# EAGLE board BattleBits (EAGLE 9.3.2)
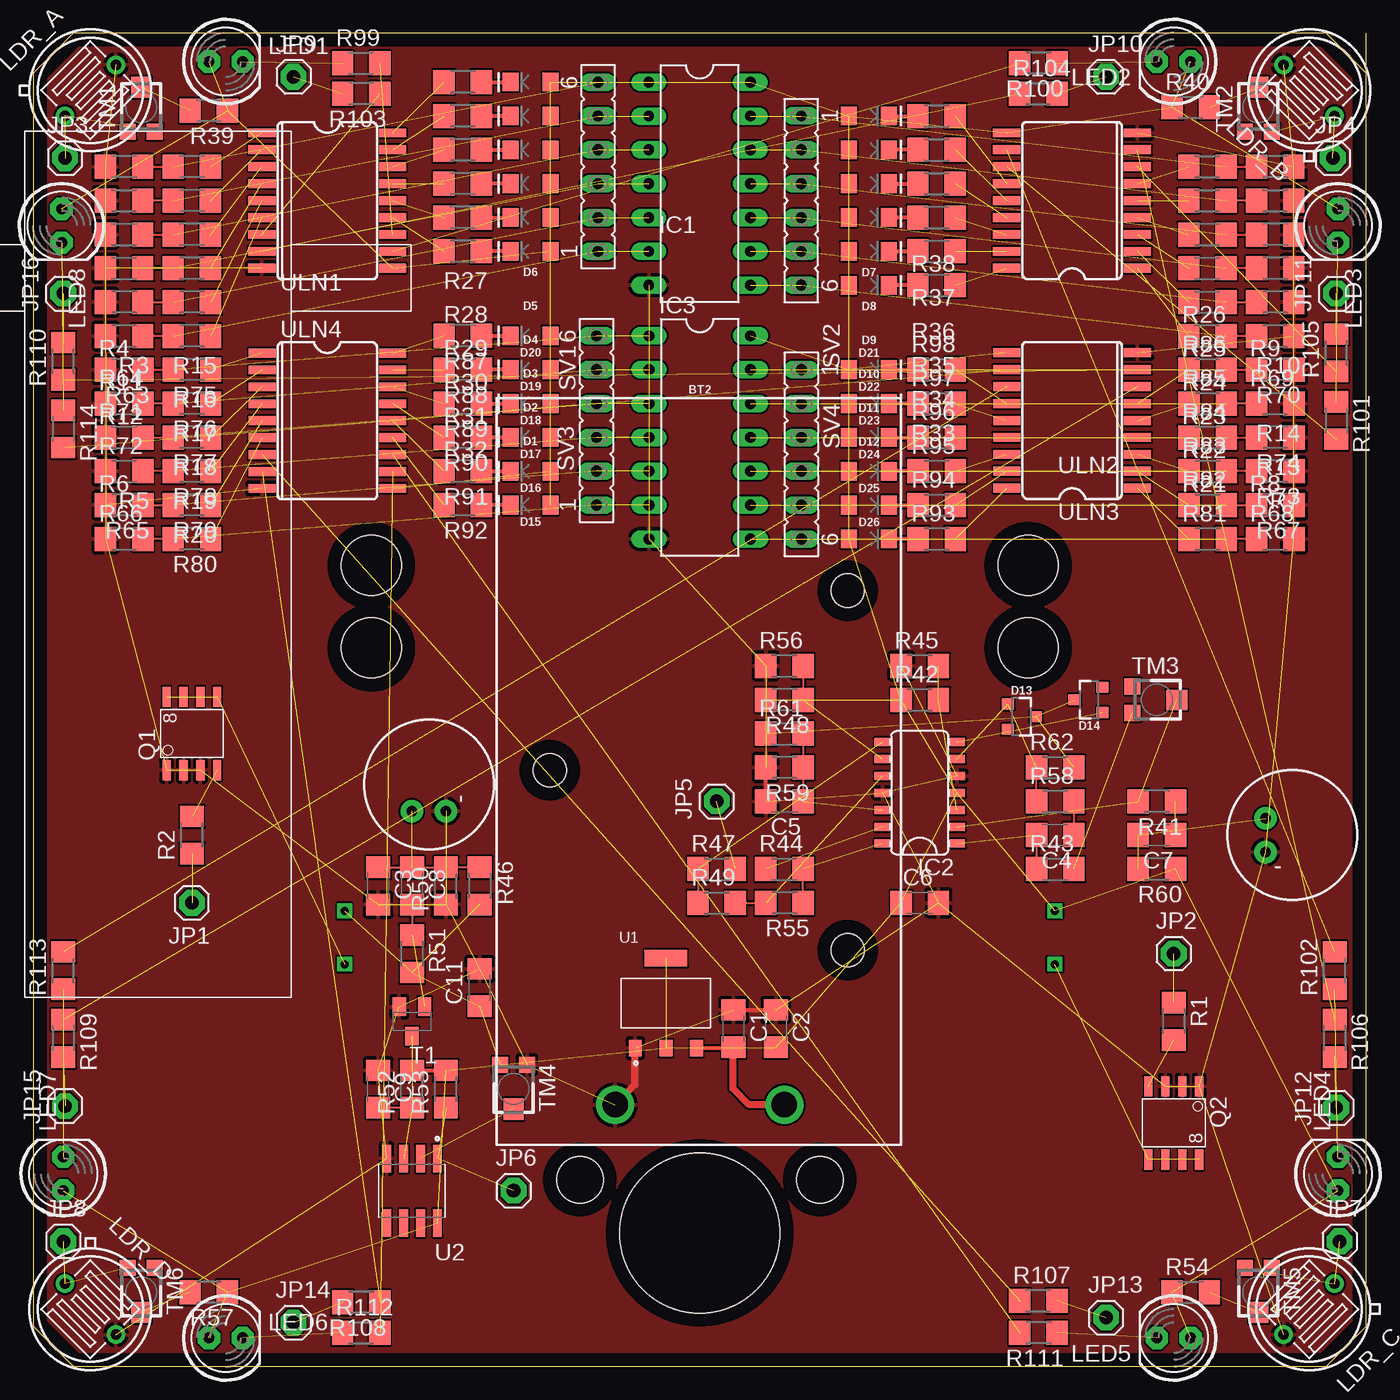
[diagram p0: board, top side]
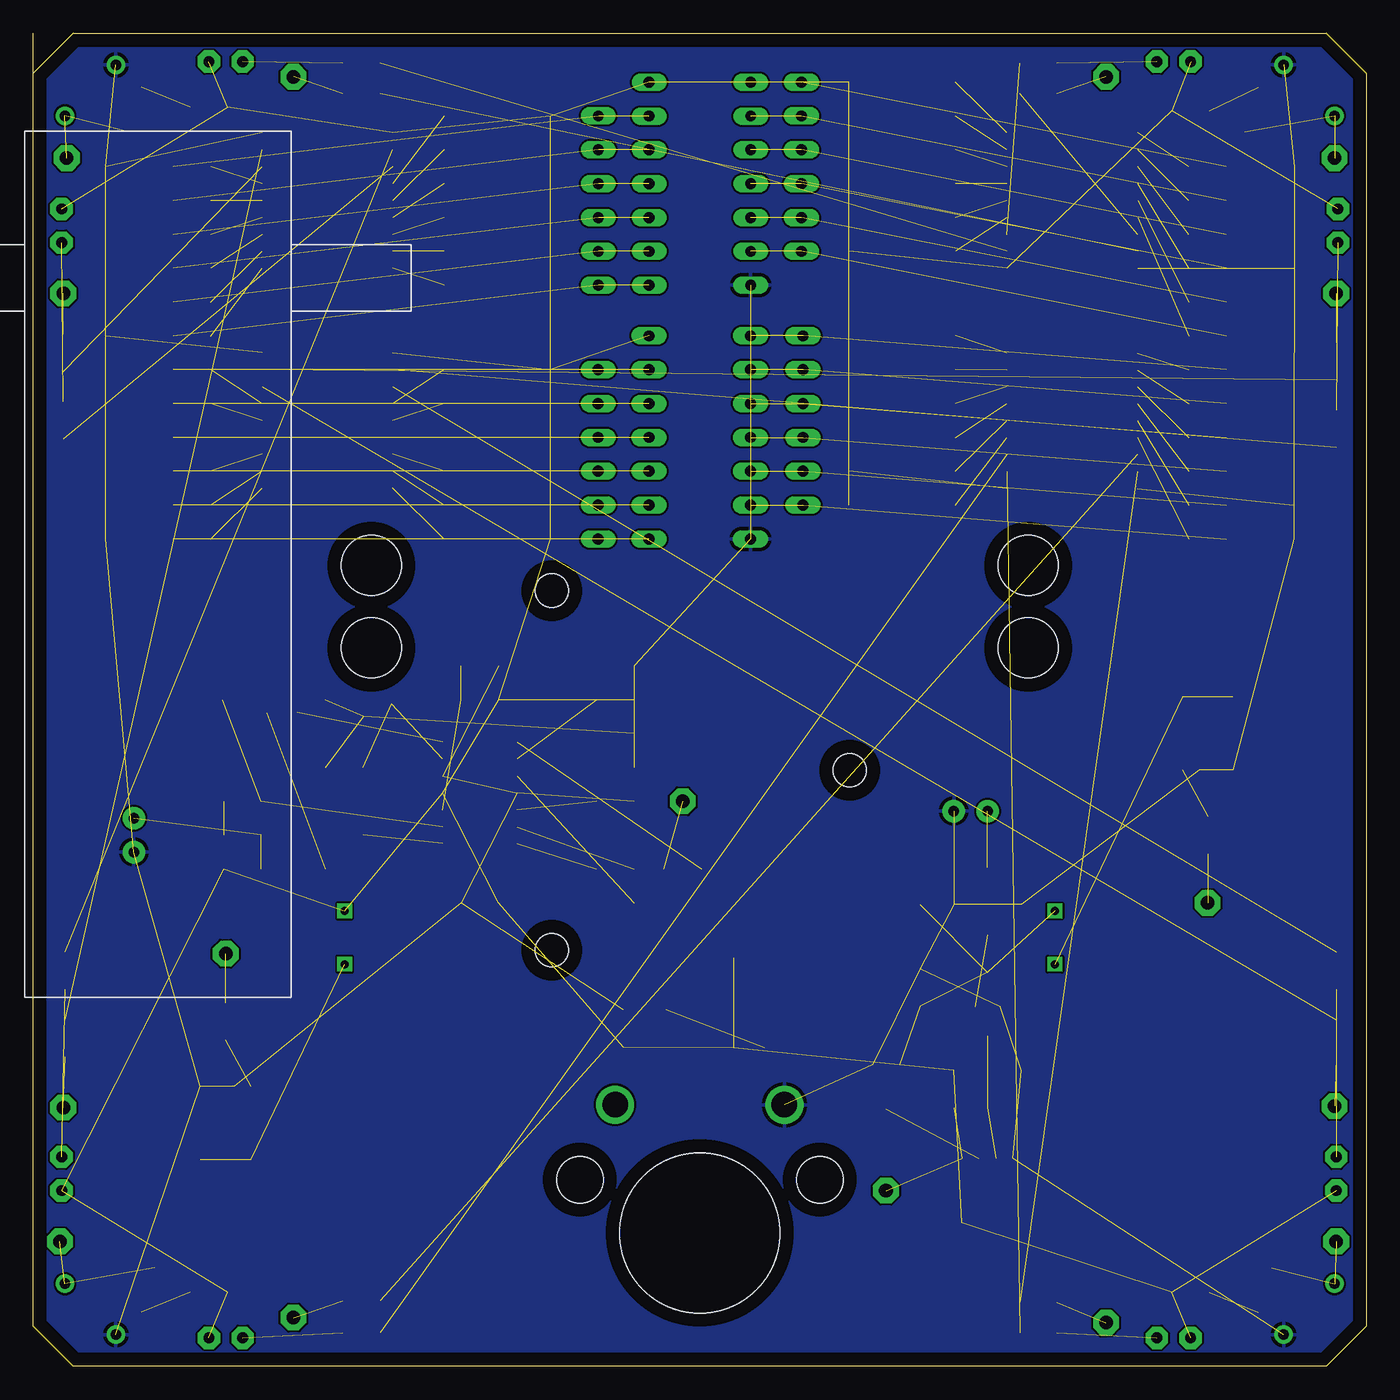
[diagram p1: board, bottom side, seen from below]

Size 100 x 100 mm. Coordinates in mm from the lower left corner, seen from the top.
Outline: 100,97 100,3 97,0 3,0 0,3 0,97 3,100 97,100 100,97
Outline: 100,97 100,100
Copper layers (1*16): Top 0.035mm / dielectric 1.5mm / Bottom 0.035mm
Design rules "default *": minimum track width 6mil, minimum drill 0.35mm, track to track 6mil, track to pad 6mil, pad to pad 6mil, via to via 6mil, smd to smd 6mil, copper to edge 40mil, drill to drill 6mil, minimum pad ring 10mil, minimum via ring 8mil, stop-mask expansion 4mil, vias tented up to drill 0mil, thermal gap 10mil
Net classes: 0 PWR: width 0.305 mm, drill 0.3 mm, clearance 0.152 mm; 1 SIGNAL: width 0.152 mm, drill 0.3 mm, clearance 0.152 mm
Holes 12 mm at 50,10
Holes 3.5 mm at 59,14 41,14

## Footprints (pad centres in the part's own frame; a part is rotated, then mirrored left to right if it is on the bottom)
BATTCON_9V = drill 1.905: + 0,0; - 0,-12.7 | hole 2.5: -38.57,4.74; -25.09,-17.61; -11.6,4.74
C3216 = smd 1.6 x 1.8: 1 -1.4,0; 2 1.4,0
LED-1206 = smd 1.2 x 1.4: A -1.5,0; C 1.5,0
SOT23-3 = smd 0.8 x 0.9: 1 -0.95,-1; 2 0.95,-1; 3 0,1.1
DIL14 = drill 0.813 long: 1 -7.62,-3.81; 2 -5.08,-3.81; 3 -2.54,-3.81; 4 0,-3.81; 5 2.54,-3.81; 6 5.08,-3.81; 7 7.62,-3.81; 8 7.62,3.81; 9 5.08,3.81; 10 2.54,3.81; 11 0,3.81; 12 -2.54,3.81; 13 -5.08,3.81; 14 -7.62,3.81
SO014 = smd 0.6 x 1.2: 1 -3.175,-2.8; 2 -1.905,-2.8; 3 -0.635,-2.8; 4 0.635,-2.8; 5 1.905,-2.8; 6 3.175,-2.8; 7 4.445,-2.8; 8 4.445,2.8; 9 3.175,2.8; 10 1.905,2.8; 11 0.635,2.8; 12 -0.635,2.8; 13 -1.905,2.8; 14 -3.175,2.8
1X01 = drill 1.016 pad 1.93 octagon: 1 0,0
TO-5_V10 = drill 0.8 pad 1.4: 1 -2.7,0; 2 2.7,0
LED5MM = drill 0.813 pad 1.676 octagon: A -1.27,0; K 1.27,0
MIC-9.7MM = drill 0.8 pad 1.676: 1 -2,1.27; 2 -2,-1.27
SO-8 = smd 1.524 x 0.61: 1 -2.743,1.905; 2 -2.743,0.635; 3 -2.743,-0.635; 4 -2.743,-1.905; 5 2.743,-1.905; 6 2.743,-0.635; 7 2.743,0.635; 8 2.743,1.905
R3216 = smd 1.6 x 1.8: 1 -1.4,0; 2 1.4,0
FE06 = drill 0.813 long: 1 -6.35,0; 2 -3.81,0; 3 -1.27,0; 4 1.27,0; 5 3.81,0; 6 6.35,0
SOT23-BEC = smd 1 x 1.4: B -0.95,-1.1; C 0,1.1; E 0.95,-1.1
TC33X = smd 1.2 x 1.2: 1 -1,-1.825; 3 1,-1.825 | smd 1.5 x 1.6: 2 0,1.5
SOT-223 = smd 0.96 x 1.26: 1 -2.3,-3.375; 2 0,-3.375; 3 2.3,-3.375 | smd 3.19 x 1.26: 4 0,3.375
8-SOIC = smd 0.66 x 2.07: 1 -1.905,-2.42; 2 -0.635,-2.42; 3 0.635,-2.42; 4 1.905,-2.42; 5 1.905,2.42; 6 0.635,2.42; 7 -0.635,2.42; 8 -1.905,2.42
GEARMOTOR = drill 0.6 square: P$1 14,-30; P$2 14,-26 | hole 4.5: 16,-6.27; 16,-0.08
SO18L = smd 0.66 x 2.032: 1 -0.635,-4.902; 2 0.635,-4.902; 3 1.905,-4.902; 4 3.175,-4.902; 5 4.445,-4.902; 6 5.715,-4.902; 7 6.985,-4.902; 8 8.255,-4.902; 9 9.525,-4.902; 10 9.525,4.902; 11 8.255,4.902; 12 6.985,4.902; 13 5.715,4.902; 14 4.445,4.902; 15 3.175,4.902; 16 1.905,4.902; 17 0.635,4.902; 18 -0.635,4.902

## Placement (x,y rotation side)
BT2  [BATTCON_9V]  56.35,19.62 270 top
C1  10uF  [C3216]  52.54,25.33 270 top
C2  10uF  [C3216]  55.72,25.33 270 top
C3  0.1uF  [C3216]  25.87,36.03 270 top
C4  1.0uF  [C3216]  76.67,39.84 180 top
C5  10uF  [C3216]  56.35,42.38 180 top
C6  0.1uF  [C3216]  66.51,34.76 0 top
C7  10uF  [C3216]  84.29,39.84 180 top
C8  0.1uF  [C3216]  28.41,36.03 270 top
C9  0.1uF  [C3216]  25.87,20.79 270 top
C11  1.0uF  [C3216]  33.49,28.41 90 top
D1  [LED-1206]  37.29,83.64 180 top
D2  [LED-1206]  37.29,86.18 180 top
D3  [LED-1206]  37.29,88.72 180 top
D4  [LED-1206]  37.29,91.26 180 top
D5  [LED-1206]  37.29,93.8 180 top
D6  [LED-1206]  37.29,96.34 180 top
D7  [LED-1206]  62.69,93.8 0 top
D8  [LED-1206]  62.69,91.26 0 top
D9  [LED-1206]  62.69,88.72 0 top
D10  [LED-1206]  62.69,86.18 0 top
D11  [LED-1206]  62.69,83.64 0 top
D12  [LED-1206]  62.69,81.1 0 top
D13  40V, 120 mA  [SOT23-3]  74.13,48.73 270 top
D14  40V, 120 mA  [SOT23-3]  79.21,50 90 top
D15  [LED-1206]  37.3,64.61 180 top
D16  [LED-1206]  37.3,67.14 180 top
D17  [LED-1206]  37.3,69.69 180 top
D18  [LED-1206]  37.3,72.22 180 top
D19  [LED-1206]  37.3,74.77 180 top
D20  [LED-1206]  37.3,77.31 180 top
D21  [LED-1206]  62.7,74.77 0 top
D22  [LED-1206]  62.7,72.22 0 top
D23  [LED-1206]  62.7,69.69 0 top
D24  [LED-1206]  62.7,67.14 0 top
D25  [LED-1206]  62.7,64.61 0 top
D26  [LED-1206]  62.7,62.06 0 top
IC1  4001N  [DIL14]  49.99,88.72 270 top
IC2  LMV324  [SO014]  66.51,42.38 90 top
IC3  4001N  [DIL14]  50,69.69 270 top
JP1  [1X01]  11.9,34.76 180 top
JP2  [1X01]  85.56,30.95 0 top
JP3  [1X01]  2.38,90.64 0 top
JP4  [1X01]  97.5,90.64 0 top
JP5  [1X01]  51.27,42.38 90 top
JP6  [1X01]  36.03,13.17 0 top
JP7  [1X01]  98.01,9.36 0 top
JP8  [1X01]  2.25,9.36 0 top
JP9  [1X01]  19.52,96.74 0 top
JP10  [1X01]  80.48,96.74 0 top
JP11  [1X01]  97.75,80.48 90 top
JP12  [1X01]  97.75,19.39 90 top
JP13  [1X01]  80.48,3.65 0 top
JP14  [1X01]  19.52,3.26 0 top
JP15  [1X01]  2.38,19.52 90 top
JP16  [1X01]  2.25,80.48 90 top
LDR_A  V1060_21  [TO-5_V10]  4.28,95.72 225 top
LDR_B  V1060_21  [TO-5_V10]  95.72,95.72 315 top
LDR_C  V1060_21  [TO-5_V10]  95.72,4.28 45 top
LDR_D  V1060_21  [TO-5_V10]  4.28,4.28 135 top
LED1  [LED5MM]  14.44,97.88 0 top
LED2  [LED5MM]  85.56,97.88 180 top
LED3  [LED5MM]  97.88,85.56 270 top
LED4  [LED5MM]  97.88,14.44 90 top
LED5  [LED5MM]  85.56,2.12 180 top
LED6  [LED5MM]  14.44,2.12 0 top
LED7  [LED5MM]  2.25,14.44 90 top
LED8  [LED5MM]  2.12,85.56 270 top
MIC1  MIC9.7MM  [MIC-9.7MM]  94.45,39.84 0 top
MIC2  MIC9.7MM  [MIC-9.7MM]  29.68,43.65 90 top
Q1  FDS5680  [SO-8]  11.9,47.46 90 top
Q2  FDS5680  [SO-8]  85.56,18.25 270 top
R1  10K, 1%  [R3216]  85.56,25.87 270 top
R2  10K, 1%  [R3216]  11.9,39.84 90 top
R3  10K, 1%  [R3216]  6.81,89.99 180 top
R4  10K, 1%  [R3216]  6.81,87.45 0 top
R5  10K, 1%  [R3216]  6.81,79.83 180 top
R6  10K, 1%  [R3216]  6.81,77.29 0 top
R7  10K, 1%  [R3216]  93.17,79.83 180 top
R8  10K, 1%  [R3216]  93.17,77.29 0 top
R9  10K, 1%  [R3216]  93.17,87.45 0 top
R10  10K, 1%  [R3216]  93.17,89.99 180 top
R11  10K, 1%  [R3216]  6.81,84.91 0 top
R12  10K, 1%  [R3216]  6.81,82.37 0 top
R13  10K, 1%  [R3216]  93.17,82.37 180 top
R14  10K, 1%  [R3216]  93.17,84.91 180 top
R15  10K, 1%  [R3216]  11.89,89.99 180 top
R16  10K, 1%  [R3216]  11.89,87.45 180 top
R17  10K, 1%  [R3216]  11.89,84.91 180 top
R18  10K, 1%  [R3216]  11.89,82.37 180 top
R19  10K, 1%  [R3216]  11.89,79.83 180 top
R20  10K, 1%  [R3216]  11.89,77.29 180 top
R21  10K, 1%  [R3216]  88.09,77.29 0 top
R22  10K, 1%  [R3216]  88.09,79.83 0 top
R23  10K, 1%  [R3216]  88.09,82.37 0 top
R24  10K, 1%  [R3216]  88.09,84.91 0 top
R25  10K, 1%  [R3216]  88.09,87.45 0 top
R26  10K, 1%  [R3216]  88.09,89.99 0 top
R27  10K, 1%  [R3216]  32.21,96.34 180 top
R28  10K, 1%  [R3216]  32.21,93.8 180 top
R29  10K, 1%  [R3216]  32.21,91.26 180 top
R30  10K, 1%  [R3216]  32.21,88.72 180 top
R31  10K, 1%  [R3216]  32.21,86.18 180 top
R32  10K, 1%  [R3216]  32.21,83.64 180 top
R33  10K, 1%  [R3216]  67.77,81.1 0 top
R34  10K, 1%  [R3216]  67.77,83.64 0 top
R35  10K, 1%  [R3216]  67.77,86.18 0 top
R36  10K, 1%  [R3216]  67.77,88.72 0 top
R37  10K, 1%  [R3216]  67.77,91.26 0 top
R38  10K, 1%  [R3216]  67.77,93.8 0 top
R39  2K, 1%  [R3216]  13.17,94.2 180 top
R40  2K, 1%  [R3216]  86.83,94.45 0 top
R41  1K, 1%  [R3216]  84.29,42.38 180 top
R42  10K, 1%  [R3216]  66.51,50 0 top
R43  10K, 1%  [R3216]  76.67,37.3 0 top
R44  1K, 1%  [R3216]  56.35,37.3 0 top
R45  10K, 1%  [R3216]  66.51,52.54 0 top
R46  10K, 1%  [R3216]  33.49,36.03 270 top
R47  100, 1%  [R3216]  51.27,37.3 0 top
R48  100K, 1%  [R3216]  56.35,50 180 top
R49  100K, 1%  [R3216]  51.27,34.76 0 top
R50  51K, 1%  [R3216]  30.95,36.03 90 top
R51  510K, 1%  [R3216]  28.41,30.95 270 top
R52  10K, 1%  [R3216]  28.41,20.79 90 top
R53  10K, 1%  [R3216]  30.95,20.79 90 top
R54  2K, 1%  [R3216]  86.83,5.55 0 top
R55  1K, 1%  [R3216]  56.35,34.76 180 top
R56  3.3K, 1%  [R3216]  56.35,52.54 0 top
R57  2K, 1%  [R3216]  13.17,5.55 180 top
R58  10K, 1%  [R3216]  76.67,42.38 0 top
R59  10K, 1%  [R3216]  56.35,44.92 180 top
R60  2.2K, 1%  [R3216]  84.29,37.3 180 top
R61  100, 1%  [R3216]  56.35,47.46 0 top
R62  22K, 1%  [R3216]  76.67,44.92 0 top
R63  10K, 1%  [R3216]  6.82,74.77 180 top
R64  10K, 1%  [R3216]  6.82,72.22 0 top
R65  10K, 1%  [R3216]  6.82,64.61 180 top
R66  10K, 1%  [R3216]  6.82,62.06 0 top
R67  10K, 1%  [R3216]  93.18,64.61 180 top
R68  10K, 1%  [R3216]  93.18,62.06 0 top
R69  10K, 1%  [R3216]  93.18,72.22 0 top
R70  10K, 1%  [R3216]  93.18,74.77 180 top
R71  10K, 1%  [R3216]  6.82,69.69 0 top
R72  10K, 1%  [R3216]  6.82,67.14 0 top
R73  10K, 1%  [R3216]  93.18,67.14 180 top
R74  10K, 1%  [R3216]  93.18,69.69 180 top
R75  10K, 1%  [R3216]  11.9,74.77 180 top
R76  10K, 1%  [R3216]  11.9,72.22 180 top
R77  10K, 1%  [R3216]  11.9,69.69 180 top
R78  10K, 1%  [R3216]  11.9,67.14 180 top
R79  10K, 1%  [R3216]  11.9,64.61 180 top
R80  10K, 1%  [R3216]  11.9,62.06 180 top
R81  10K, 1%  [R3216]  88.1,62.06 0 top
R82  10K, 1%  [R3216]  88.1,64.61 0 top
R83  10K, 1%  [R3216]  88.1,67.14 0 top
R84  10K, 1%  [R3216]  88.1,69.69 0 top
R85  10K, 1%  [R3216]  88.1,72.22 0 top
R86  10K, 1%  [R3216]  88.1,74.77 0 top
R87  10K, 1%  [R3216]  32.22,77.31 180 top
R88  10K, 1%  [R3216]  32.22,74.77 180 top
R89  10K, 1%  [R3216]  32.22,72.22 180 top
R90  10K, 1%  [R3216]  32.22,69.69 180 top
R91  10K, 1%  [R3216]  32.22,67.14 180 top
R92  10K, 1%  [R3216]  32.22,64.61 180 top
R93  10K, 1%  [R3216]  67.78,62.06 0 top
R94  10K, 1%  [R3216]  67.78,64.61 0 top
R95  10K, 1%  [R3216]  67.78,67.14 0 top
R96  10K, 1%  [R3216]  67.78,69.69 0 top
R97  10K, 1%  [R3216]  67.78,72.22 0 top
R98  10K, 1%  [R3216]  67.78,74.77 0 top
R99  100, 1%  [R3216]  24.6,97.75 0 top
R100  100, 1%  [R3216]  75.4,97.75 180 top
R101  100, 1%  [R3216]  97.75,70.95 270 top
R102  100, 1%  [R3216]  97.62,29.68 90 top
R103  10K, 1%  [R3216]  24.6,95.47 180 top
R104  10K, 1%  [R3216]  75.4,95.47 0 top
R105  10K, 1%  [R3216]  97.75,76.03 90 top
R106  10K, 1%  [R3216]  97.62,24.6 270 top
R107  10K, 1%  [R3216]  75.4,4.91 0 top
R108  10K, 1%  [R3216]  24.6,4.79 180 top
R109  10K, 1%  [R3216]  2.25,24.6 270 top
R110  10K, 1%  [R3216]  2.25,75.4 90 top
R111  100, 1%  [R3216]  75.4,2.5 180 top
R112  100, 1%  [R3216]  24.6,2.5 0 top
R113  100, 1%  [R3216]  2.25,29.68 90 top
R114  100, 1%  [R3216]  2.25,70.32 270 top
SV1  [FE06]  42.37,89.99 90 top
SV2  [FE06]  57.61,87.45 270 top
SV3  [FE06]  42.25,70.95 90 top
SV4  [FE06]  57.62,68.41 270 top
T1  [SOT23-BEC]  28.41,25.87 180 top
TM1  100K trimpot  [TC33X]  8.09,94.45 0 top
TM2  100K trimpot  [TC33X]  91.91,94.45 0 top
TM3  1M trimpot  [TC33X]  84.29,50 270 top
TM4  10k trimpot  [TC33X]  36.03,20.79 180 top
TM5  100K trimpot  [TC33X]  91.91,5.55 180 top
TM6  100K trimpot  [TC33X]  8.09,5.55 180 top
U1  NCP1117_5V  [SOT-223]  47.46,27.24 0 top
U2  LM293D  [8-SOIC]  28.41,13.17 180 top
U$1  MOTOR  [GEARMOTOR]  9.36,60.16 0 top
U$2  MOTOR  [GEARMOTOR]  90.64,60.16 0 bottom
ULN1  [SO18L]  22.05,91.9 270 top
ULN2  [SO18L]  77.93,83 90 top
ULN3  [SO18L]  77.94,66.51 90 top
ULN4  [SO18L]  22.06,75.38 270 top

## Library data of the parts
BT2 = SparkFun-Batteries; PROD_ID: BATT-10855
C1-C9 C11 = rcl; SPICEPREFIX: C
D1-D12 D15-D26 = SparkFun-LED
D13 D14 = SparkFun-DiscreteSemi; PROD_ID: DIO-08411
IC1 IC3 = 40xx
IC2 = SparkFun-AnalogIC; PROD_ID: IC-08227
JP1-JP16 LED1-LED8 TM1-TM6 = adafruit
LDR_A LDR_B LDR_C LDR_D = photo-elements
MIC1 MIC2 = SparkFun-Sensors; PROD_ID: COMP-08856
Q1 Q2 = transistor-fet
R1-R114 = rcl; SPICEPREFIX: R
SV1-SV4 = con-lsta; OC_FARNELL: unknown; OC_NEWARK: unknown
T1 = DC_LOAD_AU
U1 = IC; CREATED_BY: PCBLayout.com; DIGIKEY_PART_NUMBER: NCP1117ST33T3GOSTR-ND; MANUFACTURER: ON Semiconductor; MPN: NCP1117ST33T3G; PACKAGE: SOT-223
U2 = IC; CREATED_BY: PCBLayout.com; DIGIKEY_PART_NUMBER: 296-9531-5-ND; MANUFACTURER: Texas Instruments; MPN: LM293D; PACKAGE: 8-SOIC
U$1 U$2 = gearmotor
ULN1-ULN4 = SparkFun-IC-Special-Function

## Nets
40XX_CH_A_IN_A [SIGNAL]: IC1.1 R3.1 R15.2 SV1.6
40XX_CH_A_IN_B [SIGNAL]: IC1.2 R4.2 R16.2 SV1.5
40XX_CH_A_OUT [SIGNAL]: IC1.3 R11.2 R17.2 SV1.4
40XX_CH_B_IN_A [SIGNAL]: IC1.5 R5.1 R19.2 SV1.2
40XX_CH_B_IN_B [SIGNAL]: IC1.6 R6.2 R20.2 SV1.1
40XX_CH_B_OUT [SIGNAL]: IC1.4 R12.2 R18.2 SV1.3
40XX_CH_C_IN_A [SIGNAL]: IC1.8 R8.1 R21.2 SV2.6
40XX_CH_C_IN_B [SIGNAL]: IC1.9 R7.2 R22.2 SV2.5
40XX_CH_C_OUT [SIGNAL]: IC1.10 R13.2 R23.2 SV2.4
40XX_CH_D_IN_A [SIGNAL]: IC1.12 R9.1 R25.2 SV2.2
40XX_CH_D_IN_B [SIGNAL]: IC1.13 R10.2 R26.2 SV2.1
40XX_CH_D_OUT [SIGNAL]: IC1.11 R14.2 R24.2 SV2.3
40XX_CH_E_IN_A [SIGNAL]: IC3.1 R63.1 R75.2 SV3.6
40XX_CH_E_IN_B [SIGNAL]: IC3.2 R64.2 R76.2 SV3.5
40XX_CH_E_OUT [SIGNAL]: IC3.3 R71.2 R77.2 SV3.4
40XX_CH_F_IN_A [SIGNAL]: IC3.5 R65.1 R79.2 SV3.2
40XX_CH_F_IN_B [SIGNAL]: IC3.6 R66.2 R80.2 SV3.1
40XX_CH_F_OUT [SIGNAL]: IC3.4 R72.2 R78.2 SV3.3
40XX_CH_G_IN_A [SIGNAL]: IC3.8 R68.1 R81.2 SV4.6
40XX_CH_G_IN_B [SIGNAL]: IC3.9 R67.2 R82.2 SV4.5
40XX_CH_G_OUT [SIGNAL]: IC3.10 R73.2 R83.2 SV4.4
40XX_CH_H_IN_A [SIGNAL]: IC3.12 R69.1 R85.2 SV4.2
40XX_CH_H_IN_B [SIGNAL]: IC3.13 R70.2 R86.2 SV4.1
40XX_CH_H_OUT [SIGNAL]: IC3.11 R74.2 R84.2 SV4.3
AMPENV [SIGNAL]: IC2.14 R44.2 R55.1
GND: BT2.- C1.1 C2.1 C3.2 C5.2 C6.2 C9.1 C11.2 IC1.7 IC2.5 IC2.11 IC3.7 LDR_A.1 LDR_B.1 LDR_C.1 LDR_D.1 MIC1.2 MIC2.2 Q1.1 Q1.2 Q1.3 Q2.1 Q2.2 Q2.3 R3.2 R4.1 R5.2 R6.1 R7.1 R8.2 R9.2 R10.1 R11.1 R12.1 R13.1 R14.1 R45.1 R50.1 R56.1 R59.2 R63.2 R64.1 R65.2 R66.1 R67.1 R68.2 R69.2 R70.1 R71.1 R72.1 R73.1 R74.1 T1.E TM4.1 U1.1 U2.4 ULN1.9 ULN2.9 ULN3.9 ULN4.9
LED_CH_A_IN [SIGNAL]: JP9.1 R103.2
LED_CH_A_OUT: R99.2 ULN1.12
LED_CH_B_IN [SIGNAL]: JP10.1 R104.2
LED_CH_B_OUT: R100.2 ULN1.11
LED_CH_C_IN [SIGNAL]: JP11.1 R105.2
LED_CH_C_OUT: R101.2 ULN2.12
LED_CH_D_IN [SIGNAL]: JP12.1 R106.2
LED_CH_D_OUT: R102.2 ULN2.11
LED_CH_E_IN [SIGNAL]: JP13.1 R107.2
LED_CH_E_OUT: R111.2 ULN4.12
LED_CH_F_IN [SIGNAL]: JP14.1 R108.2
LED_CH_F_OUT: R112.2 ULN4.11
LED_CH_G_IN [SIGNAL]: JP15.1 R109.2
LED_CH_G_OUT: R113.2 ULN3.12
LED_CH_H_IN [SIGNAL]: JP16.1 R110.2
LED_CH_H_OUT: R114.2 ULN3.11
LIGHT_SENSOR_A_OUT [SIGNAL]: JP3.1 LDR_A.2 TM1.3
LIGHT_SENSOR_B_OUT [SIGNAL]: JP4.1 LDR_B.2 TM2.3
LIGHT_SENSOR_C_OUT [SIGNAL]: JP7.1 LDR_C.2 TM5.3
LIGHT_SENSOR_D_OUT [SIGNAL]: JP8.1 LDR_D.2 TM6.3
MOTOR_A-: Q1.5 Q1.6 Q1.7 Q1.8 U$1.P$1
MOTOR_B-: Q2.5 Q2.6 Q2.7 Q2.8 U$2.P$1
N$ [SIGNAL]: C4.2 IC2.1 R43.1
N$5 [SIGNAL]: R15.1 ULN1.1
N$6 [SIGNAL]: Q1.4 R2.2
N$7 [SIGNAL]: Q2.4 R1.2
N$8 [SIGNAL]: R16.1 ULN1.2
N$9 [SIGNAL]: R17.1 ULN1.3
N$10 [SIGNAL]: R18.1 ULN1.4
N$11 [SIGNAL]: R19.1 ULN1.5
N$12 [SIGNAL]: R20.1 ULN1.6
N$13 [SIGNAL]: R21.1 ULN2.1
N$14 [SIGNAL]: R22.1 ULN2.2
N$15 [SIGNAL]: R23.1 ULN2.3
N$16 [SIGNAL]: R24.1 ULN2.4
N$17 [SIGNAL]: R25.1 ULN2.5
N$18 [SIGNAL]: R26.1 ULN2.6
N$19: R27.2 ULN1.18
N$20: D6.C R27.1
N$21: R28.2 ULN1.17
N$22: D5.C R28.1
N$23: R29.2 ULN1.16
N$24: D4.C R29.1
N$25: R30.2 ULN1.15
N$26: D3.C R30.1
N$27: R31.2 ULN1.14
N$28: D2.C R31.1
N$29: R32.2 ULN1.13
N$30: D1.C R32.1
N$31: D12.C R33.1
N$32: D11.C R34.1
N$33: D10.C R35.1
N$34: D9.C R36.1
N$35: D8.C R37.1
N$36: D7.C R38.1
N$37: R33.2 ULN2.18
N$38: R34.2 ULN2.17
N$39: R35.2 ULN2.16
N$40: R36.2 ULN2.15
N$41: R37.2 ULN2.14
N$42: R38.2 ULN2.13
N$44 [SIGNAL]: R39.2 TM1.2
N$45 [SIGNAL]: R40.2 TM2.2
N$46 [SIGNAL]: C7.2 MIC1.1 R60.2
N$47 [SIGNAL]: IC2.3 R42.2 R45.2
N$48 [SIGNAL]: IC2.2 R41.2 TM3.2
N$49 [SIGNAL]: C7.1 R41.1
N$50 [SIGNAL]: C4.1 R58.2
N$51 [SIGNAL]: D13.1 IC2.6 R58.1 R62.1
N$52 [SIGNAL]: D14.1 IC2.7
N$53 [SIGNAL]: D13.3 D14.3 R61.1 R62.2
N$54 [SIGNAL]: C5.1 IC2.12 R59.1 R61.2
N$55 [SIGNAL]: IC2.13 R44.1
N$56 [SIGNAL]: IC2.9 R48.1 R56.2
N$57 [SIGNAL]: IC2.10 R49.2 R55.2
N$58 [SIGNAL]: IC2.8 R47.1 R49.1
N$59 [SIGNAL]: R43.2 TM3.3
N$60 [SIGNAL]: C3.1 C8.1 MIC2.1 R46.1 R50.2
N$62 [SIGNAL]: C8.2 R51.1 T1.B
N$63 [SIGNAL]: C9.2 R52.1 T1.C U2.3
N$64 [SIGNAL]: TM4.2 U2.2
N$65 [SIGNAL]: JP6.1 R53.1 U2.1
N$67 [SIGNAL]: JP1.1 R2.1
N$68 [SIGNAL]: JP2.1 R1.1
N$69 [SIGNAL]: JP5.1 R47.2
N$70 [SIGNAL]: R54.2 TM5.2
N$71 [SIGNAL]: R57.2 TM6.2
N$74 [SIGNAL]: R75.1 ULN4.1
N$75 [SIGNAL]: R76.1 ULN4.2
N$76 [SIGNAL]: R77.1 ULN4.3
N$77 [SIGNAL]: R78.1 ULN4.4
N$78 [SIGNAL]: R79.1 ULN4.5
N$79 [SIGNAL]: R80.1 ULN4.6
N$80 [SIGNAL]: R81.1 ULN3.1
N$81 [SIGNAL]: R82.1 ULN3.2
N$82 [SIGNAL]: R83.1 ULN3.3
N$83 [SIGNAL]: R84.1 ULN3.4
N$84 [SIGNAL]: R85.1 ULN3.5
N$85 [SIGNAL]: R86.1 ULN3.6
N$86: R87.2 ULN4.18
N$87: D20.C R87.1
N$88: R88.2 ULN4.17
N$89: D19.C R88.1
N$90: R89.2 ULN4.16
N$91: D18.C R89.1
N$92: R90.2 ULN4.15
N$93: D17.C R90.1
N$94: R91.2 ULN4.14
N$95: D16.C R91.1
N$96: R92.2 ULN4.13
N$97: D15.C R92.1
N$98: D26.C R93.1
N$99: D25.C R94.1
N$100: D24.C R95.1
N$101: D23.C R96.1
N$102: D22.C R97.1
N$103: D21.C R98.1
N$104: R93.2 ULN3.18
N$105: R94.2 ULN3.17
N$106: R95.2 ULN3.16
N$107: R96.2 ULN3.15
N$108: R97.2 ULN3.14
N$109: R98.2 ULN3.13
N$111: LED1.K R99.1
N$112: LED2.K R100.1
N$113: LED3.K R101.1
N$114: LED4.K R102.1
N$115 [SIGNAL]: R103.1 ULN1.7
N$116 [SIGNAL]: R104.1 ULN1.8
N$117 [SIGNAL]: R105.1 ULN2.7
N$118 [SIGNAL]: R106.1 ULN2.8
N$119 [SIGNAL]: R107.1 ULN4.7
N$120 [SIGNAL]: R108.1 ULN4.8
N$121 [SIGNAL]: R109.1 ULN3.7
N$122 [SIGNAL]: R110.1 ULN3.8
N$123: LED5.K R111.1
N$124: LED6.K R112.1
N$125: LED7.K R113.1
N$126: LED8.K R114.1
VBAT: BT2.+ C1.2 U1.3
VDD: C2.2 C6.1 C11.1 D1.A D2.A D3.A D4.A D5.A D6.A D7.A D8.A D9.A D10.A D11.A D12.A D15.A D16.A D17.A D18.A D19.A D20.A D21.A D22.A D23.A D24.A D25.A D26.A IC1.14 IC2.4 IC3.14 LED1.A LED2.A LED3.A LED4.A LED5.A LED6.A LED7.A LED8.A R39.1 R40.1 R42.1 R46.2 R48.2 R51.2 R52.2 R53.2 R54.1 R57.1 R60.1 TM4.3 U1.2 U1.4 U2.8 U$1.P$2 U$2.P$2 ULN1.10 ULN2.10 ULN3.10 ULN4.10

## Tracks (layer width: path | path; a pad name or v marks a point on that pad's centre or on a via)
40XX_CH_A_IN_A  (2 unrouted)
  Top 0.152: R3.1 R15.2
40XX_CH_A_IN_B  (2 unrouted)
  Top 0.152: R16.2 R4.2
40XX_CH_A_OUT  (2 unrouted)
  Top 0.152: R11.2 R17.2
40XX_CH_B_IN_A  (2 unrouted)
  Top 0.152: R5.1 R19.2
40XX_CH_B_IN_B  (2 unrouted)
  Top 0.152: R20.2 R6.2
40XX_CH_B_OUT  (2 unrouted)
  Top 0.152: R18.2 R12.2
40XX_CH_C_IN_A  (2 unrouted)
  Top 0.152: R8.1 R21.2
40XX_CH_C_IN_B  (2 unrouted)
  Top 0.152: R22.2 R7.2
40XX_CH_C_OUT  (2 unrouted)
  Top 0.152: R13.2 R23.2
40XX_CH_D_IN_A  (2 unrouted)
  Top 0.152: R9.1 R25.2
40XX_CH_D_IN_B  (2 unrouted)
  Top 0.152: R26.2 R10.2
40XX_CH_D_OUT  (2 unrouted)
  Top 0.152: R24.2 R14.2
40XX_CH_E_IN_A  (2 unrouted)
  Top 0.152: R63.1 R75.2
40XX_CH_E_IN_B  (2 unrouted)
  Top 0.152: R76.2 R64.2
40XX_CH_E_OUT  (2 unrouted)
  Top 0.152: R71.2 R77.2
40XX_CH_F_IN_A  (2 unrouted)
  Top 0.152: R65.1 R79.2
40XX_CH_F_IN_B  (2 unrouted)
  Top 0.152: R80.2 R66.2
40XX_CH_F_OUT  (2 unrouted)
  Top 0.152: R78.2 R72.2
40XX_CH_G_IN_A  (2 unrouted)
  Top 0.152: R68.1 R81.2
40XX_CH_G_IN_B  (2 unrouted)
  Top 0.152: R82.2 R67.2
40XX_CH_G_OUT  (2 unrouted)
  Top 0.152: R73.2 R83.2
40XX_CH_H_IN_A  (2 unrouted)
  Top 0.152: R69.1 R85.2
40XX_CH_H_IN_B  (2 unrouted)
  Top 0.152: R86.2 R70.2
40XX_CH_H_OUT  (2 unrouted)
  Top 0.152: R84.2 R74.2
AMPENV  (1 unrouted)
  Top 0.152: R55.1 R44.2
GND  (56 unrouted)
  Top 0.305: C5.2 R59.2 | C1.1 C2.1
  Top 0.508: BT2.- 45.16,21.13 U1.1
  pour Bottom (isolate 0.152): -3.34,103.34 -3.34,-3.34 103.34,-3.34 103.34,103.34
  pour Top (isolate 0.152): -8.42,108.42 -8.42,-8.42 108.42,-8.42 108.42,108.42
LED_CH_A_IN  (1 unrouted)
LED_CH_A_OUT  (1 unrouted)
LED_CH_B_IN  (1 unrouted)
LED_CH_B_OUT  (1 unrouted)
LED_CH_C_IN  (1 unrouted)
LED_CH_C_OUT  (1 unrouted)
LED_CH_D_IN  (1 unrouted)
LED_CH_D_OUT  (1 unrouted)
LED_CH_E_IN  (1 unrouted)
LED_CH_E_OUT  (1 unrouted)
LED_CH_F_IN  (1 unrouted)
LED_CH_F_OUT  (1 unrouted)
LED_CH_G_IN  (1 unrouted)
LED_CH_G_OUT  (1 unrouted)
LED_CH_H_IN  (1 unrouted)
LED_CH_H_OUT  (1 unrouted)
LIGHT_SENSOR_A_OUT  (2 unrouted)
LIGHT_SENSOR_B_OUT  (2 unrouted)
LIGHT_SENSOR_C_OUT  (2 unrouted)
LIGHT_SENSOR_D_OUT  (2 unrouted)
MOTOR_A-  (4 unrouted)
MOTOR_B-  (4 unrouted)
N$  (1 unrouted)
  Top 0.152: C4.2 R43.1
N$5  (1 unrouted)
N$6  (1 unrouted)
N$7  (1 unrouted)
N$8  (1 unrouted)
N$9  (1 unrouted)
N$10  (1 unrouted)
N$11  (1 unrouted)
N$12  (1 unrouted)
N$13  (1 unrouted)
N$14  (1 unrouted)
N$15  (1 unrouted)
N$16  (1 unrouted)
N$17  (1 unrouted)
N$18  (1 unrouted)
N$19  (1 unrouted)
N$20
  Top 0.305: R27.1 D6.C
N$21  (1 unrouted)
N$22
  Top 0.305: D5.C R28.1
N$23  (1 unrouted)
N$24
  Top 0.305: R29.1 D4.C
N$25  (1 unrouted)
N$26
  Top 0.305: D3.C R30.1
N$27  (1 unrouted)
N$28
  Top 0.305: R31.1 D2.C
N$29  (1 unrouted)
N$30
  Top 0.305: D1.C R32.1
N$31
  Top 0.305: R33.1 D12.C
N$32
  Top 0.305: D11.C R34.1
N$33
  Top 0.305: R35.1 D10.C
N$34
  Top 0.305: D9.C R36.1
N$35
  Top 0.305: R37.1 D8.C
N$36
  Top 0.305: D7.C R38.1
N$37  (1 unrouted)
N$38  (1 unrouted)
N$39  (1 unrouted)
N$40  (1 unrouted)
N$41  (1 unrouted)
N$42  (1 unrouted)
N$44  (1 unrouted)
N$45  (1 unrouted)
N$46  (2 unrouted)
N$47  (2 unrouted)
N$48  (2 unrouted)
N$49  (1 unrouted)
N$50
  Top 0.152: R58.2 C4.1
N$51  (2 unrouted)
  Top 0.152: R58.1 R62.1
N$52  (1 unrouted)
N$53  (3 unrouted)
N$54  (1 unrouted)
  Top 0.152: R61.2 R59.1 C5.1
N$55  (1 unrouted)
N$56  (1 unrouted)
  Top 0.152: R56.2 R48.1
N$57  (1 unrouted)
  Top 0.152: R49.2 R55.2
N$58  (1 unrouted)
  Top 0.152: R47.1 R49.1
N$59  (1 unrouted)
N$60  (1 unrouted)
  Top 0.152: C3.1 C8.1 R50.2 R46.1
N$62  (1 unrouted)
  Top 0.152: C8.2 R51.1
N$63  (2 unrouted)
  Top 0.152: R52.1 C9.2
N$64  (1 unrouted)
N$65  (2 unrouted)
N$67  (1 unrouted)
N$68  (1 unrouted)
N$69  (1 unrouted)
N$70  (1 unrouted)
N$71  (1 unrouted)
N$74  (1 unrouted)
N$75  (1 unrouted)
N$76  (1 unrouted)
N$77  (1 unrouted)
N$78  (1 unrouted)
N$79  (1 unrouted)
N$80  (1 unrouted)
N$81  (1 unrouted)
N$82  (1 unrouted)
N$83  (1 unrouted)
N$84  (1 unrouted)
N$85  (1 unrouted)
N$86  (1 unrouted)
N$87
  Top 0.305: R87.1 D20.C
N$88  (1 unrouted)
N$89
  Top 0.305: D19.C R88.1
N$90  (1 unrouted)
N$91
  Top 0.305: R89.1 D18.C
N$92  (1 unrouted)
N$93
  Top 0.305: D17.C R90.1
N$94  (1 unrouted)
N$95
  Top 0.305: R91.1 D16.C
N$96  (1 unrouted)
N$97
  Top 0.305: D15.C R92.1
N$98
  Top 0.305: R93.1 D26.C
N$99
  Top 0.305: D25.C R94.1
N$100
  Top 0.305: R95.1 D24.C
N$101
  Top 0.305: D23.C R96.1
N$102
  Top 0.305: R97.1 D22.C
N$103
  Top 0.305: D21.C R98.1
N$104  (1 unrouted)
N$105  (1 unrouted)
N$106  (1 unrouted)
N$107  (1 unrouted)
N$108  (1 unrouted)
N$109  (1 unrouted)
N$111  (1 unrouted)
N$112  (1 unrouted)
N$113  (1 unrouted)
N$114  (1 unrouted)
N$115  (1 unrouted)
N$116  (1 unrouted)
N$117  (1 unrouted)
N$118  (1 unrouted)
N$119  (1 unrouted)
N$120  (1 unrouted)
N$121  (1 unrouted)
N$122  (1 unrouted)
N$123  (1 unrouted)
N$124  (1 unrouted)
N$125  (1 unrouted)
N$126  (1 unrouted)
VBAT
  Top 0.305: U1.3 52.47,23.86 52.49,23.89 C1.2
  Top 0.508: BT2.+ 53.71,19.62 52.49,20.84 52.49,23.89
VDD  (57 unrouted)
  Top 0.305: R52.2 R53.2